# EAGLE board 555srvc-X6 (EAGLE 7.2.0)
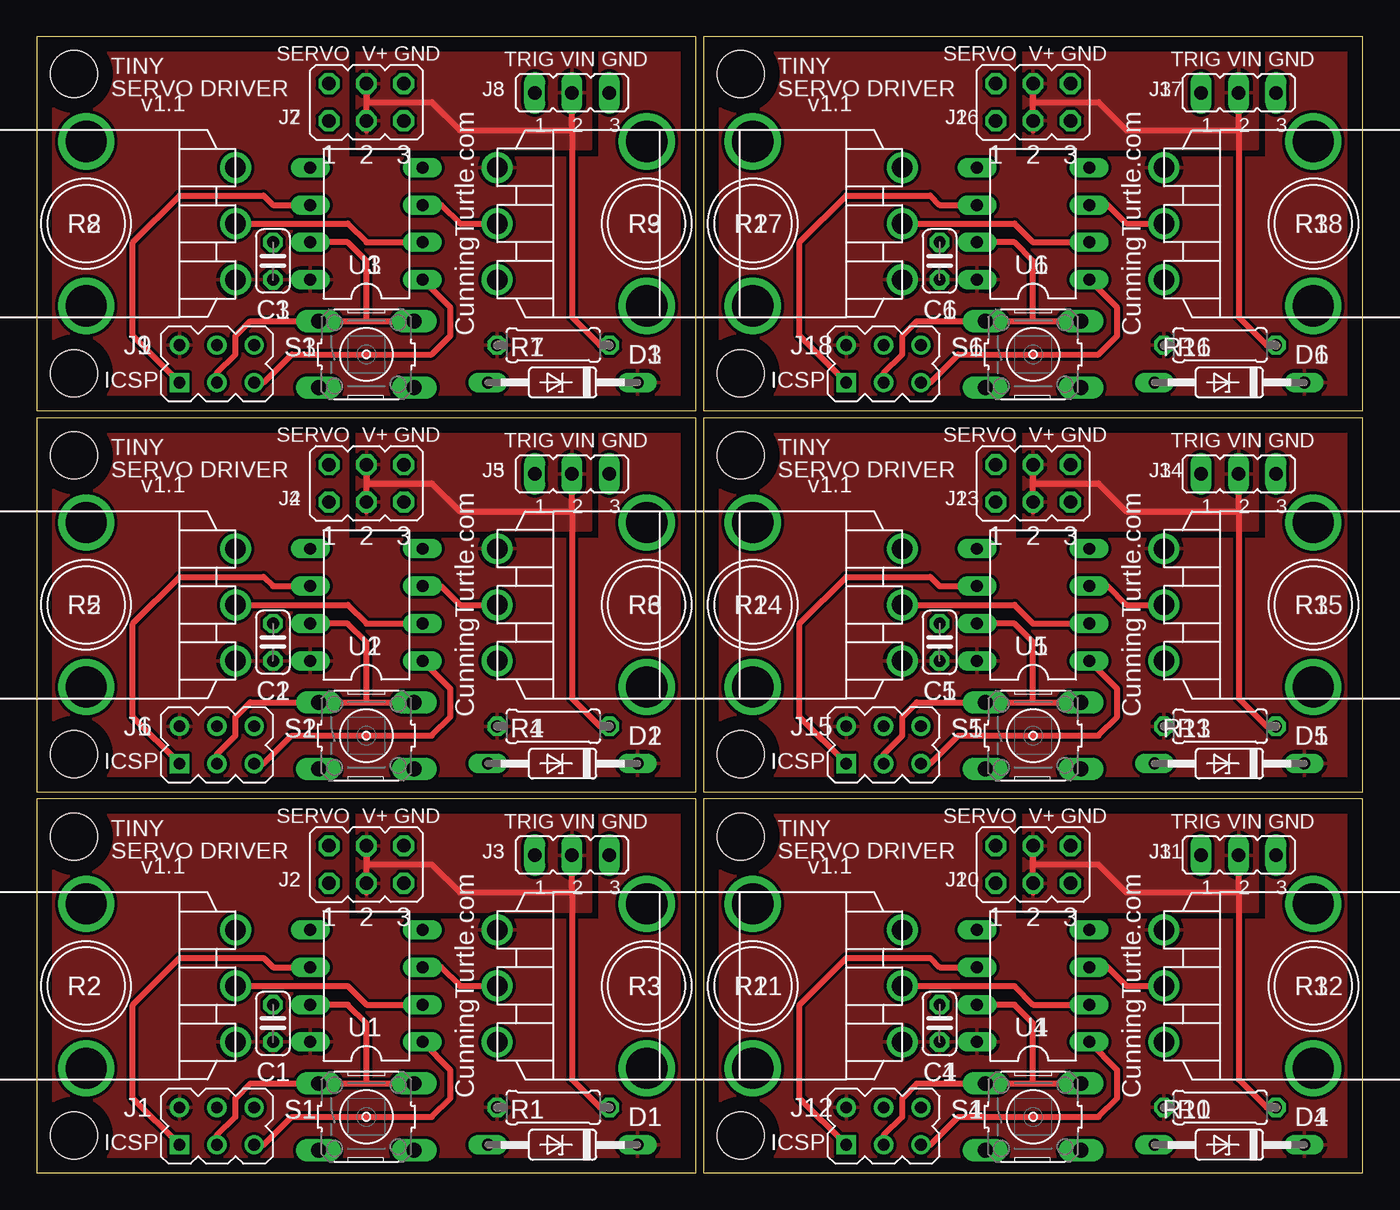
[diagram p0: board, top side]
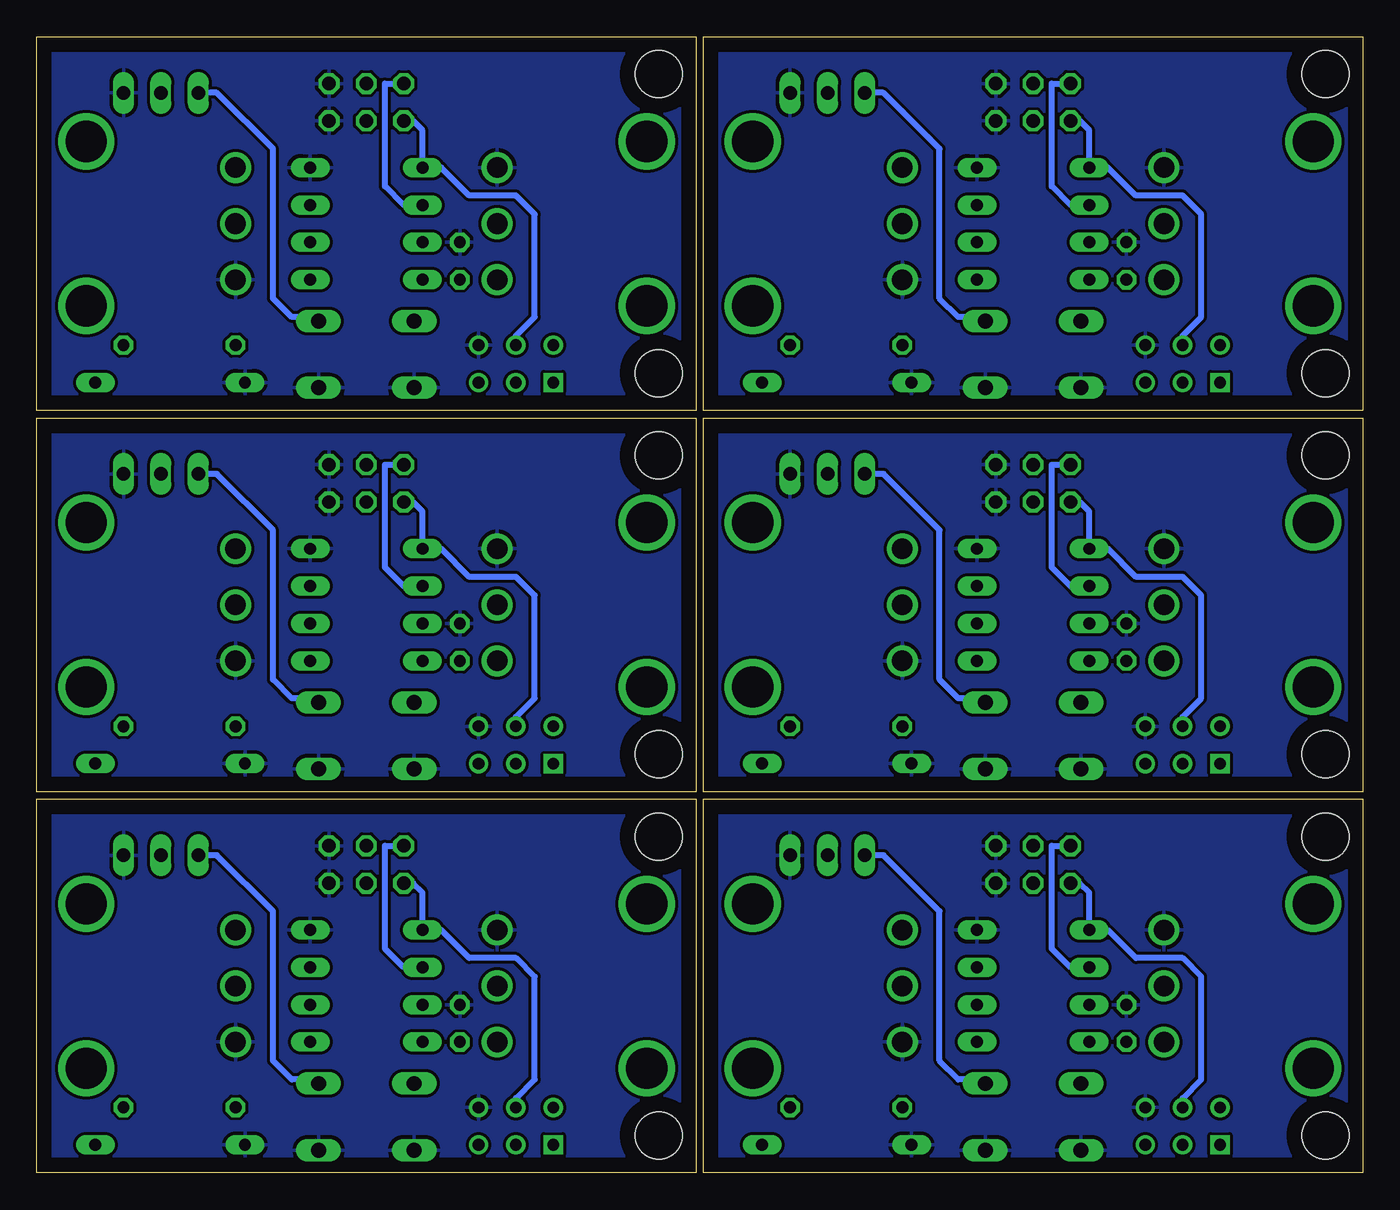
[diagram p1: board, bottom side, seen from below]

Size 90.11 x 77.21 mm. Coordinates in mm from the lower left corner, seen from the top.
Outline: 0,0 44.8,0 44.8,25.4 0,25.4 0,0
Outline: 0,25.91 44.8,25.91 44.8,51.3 0,51.3 0,25.91
Outline: 0,51.81 44.8,51.81 44.8,77.21 0,77.21 0,51.81
Outline: 45.31,0 90.11,0 90.11,25.4 45.31,25.4 45.31,0
Outline: 45.31,25.91 90.11,25.91 90.11,51.3 45.31,51.3 45.31,25.91
Outline: 45.31,51.81 90.11,51.81 90.11,77.21 45.31,77.21 45.31,51.81
Copper layers (1*16): Top 0.035mm / dielectric 1.5mm / Bottom 0.035mm
Design rules "default": minimum track width 10mil, minimum drill 0.6mm, track to track 8mil, track to pad 8mil, pad to pad 8mil, via to via 8mil, smd to smd 8mil, copper to edge 40mil, drill to drill 8mil, minimum pad ring 10mil, minimum via ring 8mil, stop-mask expansion 4mil, vias tented up to drill 0mil, thermal gap 10mil
Holes 3.2 mm at 2.54,2.54 2.54,22.86 2.54,28.45 2.54,48.77 2.54,54.35 2.54,74.67 47.85,2.54 47.85,22.86 47.85,28.45 47.85,48.77 47.85,54.35 47.85,74.67

## Footprints (pad centres in the part's own frame; a part is rotated, then mirrored left to right if it is on the bottom)
C025-024X044 = drill 0.813 octagon: 1 -1.27,0; 2 1.27,0
DO35Z10 = drill 0.813 long: A 5.08,0; C -5.08,0
AVR_ISP_6P = drill 0.8 square: 1 -2.54,-1.27 | drill 0.8: 2 -2.54,1.27; 3 0,-1.27; 4 0,1.27; 5 2.54,-1.27; 6 2.54,1.27
JP3Q = drill 0.914 octagon: 1 -2.54,-1.27; 2 -2.54,1.27; 3 0,-1.27; 4 0,1.27; 5 2.54,-1.27; 6 2.54,1.27
JP2 = drill 0.914 long: 1 -2.54,0; 2 0,0; 3 2.54,0
0207/7 = drill 0.813 octagon: 1 -3.81,0; 2 3.81,0
CT2265-ND = drill 1.4: 1 -10.16,3.81; 2 -10.16,0; 3 -10.16,-3.81 | drill 2.8: 4 0,5.588; 5 0,-5.588
TACTILE_6MM = drill 1.016 long: 1 -3.251,2.261; 2 3.251,2.261; 3 -3.251,-2.261; 4 3.251,-2.261
DIL08 = drill 0.813 long: 1 -3.81,-3.81; 2 -1.27,-3.81; 3 1.27,-3.81; 4 3.81,-3.81; 5 3.81,3.81; 6 1.27,3.81; 7 -1.27,3.81; 8 -3.81,3.81

## Placement (x,y rotation side)
C1  0.1uF  [C025-024X044]  16.05,10.16 90 top
C2  0.1uF  [C025-024X044]  16.05,36.06 90 top
C3  0.1uF  [C025-024X044]  16.05,61.97 90 top
C4  0.1uF  [C025-024X044]  61.36,10.16 90 top
C5  0.1uF  [C025-024X044]  61.36,36.06 90 top
C6  0.1uF  [C025-024X044]  61.36,61.97 90 top
D1  5.1V  [DO35Z10]  35.73,1.91 180 top
D2  5.1V  [DO35Z10]  35.73,27.81 180 top
D3  5.1V  [DO35Z10]  35.73,53.72 180 top
D4  5.1V  [DO35Z10]  81.04,1.91 180 top
D5  5.1V  [DO35Z10]  81.04,27.81 180 top
D6  5.1V  [DO35Z10]  81.04,53.72 180 top
J1  AVR_SPI_PRG  [AVR_ISP_6P]  12.24,3.17 0 top
J2  [JP3Q]  22.4,20.95 0 top
J3  [JP2]  36.37,21.59 0 top
J4  [JP3Q]  22.4,46.86 0 top
J5  [JP2]  36.37,47.49 0 top
J6  AVR_SPI_PRG  [AVR_ISP_6P]  12.24,29.08 0 top
J7  [JP3Q]  22.4,72.77 0 top
J8  [JP2]  36.37,73.4 0 top
J9  AVR_SPI_PRG  [AVR_ISP_6P]  12.24,54.98 0 top
J10  [JP3Q]  67.71,20.95 0 top
J11  [JP2]  81.68,21.59 0 top
J12  AVR_SPI_PRG  [AVR_ISP_6P]  57.55,3.17 0 top
J13  [JP3Q]  67.71,46.86 0 top
J14  [JP2]  81.68,47.49 0 top
J15  AVR_SPI_PRG  [AVR_ISP_6P]  57.55,29.08 0 top
J16  [JP3Q]  67.71,72.77 0 top
J17  [JP2]  81.68,73.4 0 top
J18  AVR_SPI_PRG  [AVR_ISP_6P]  57.55,54.98 0 top
R1  33  [0207/7]  35.1,4.45 180 top
R2  [CT2265-ND]  3.35,12.7 180 top
R3  [CT2265-ND]  41.45,12.7 0 top
R4  33  [0207/7]  35.1,30.35 180 top
R5  [CT2265-ND]  3.35,38.6 180 top
R6  [CT2265-ND]  41.45,38.6 0 top
R7  33  [0207/7]  35.1,56.26 180 top
R8  [CT2265-ND]  3.35,64.51 180 top
R9  [CT2265-ND]  41.45,64.51 0 top
R10  33  [0207/7]  80.41,4.45 180 top
R11  [CT2265-ND]  48.66,12.7 180 top
R12  [CT2265-ND]  86.76,12.7 0 top
R13  33  [0207/7]  80.41,30.35 180 top
R14  [CT2265-ND]  48.66,38.6 180 top
R15  [CT2265-ND]  86.76,38.6 0 top
R16  33  [0207/7]  80.41,56.26 180 top
R17  [CT2265-ND]  48.66,64.51 180 top
R18  [CT2265-ND]  86.76,64.51 0 top
S1  [TACTILE_6MM]  22.4,3.81 0 top
S2  [TACTILE_6MM]  22.4,29.71 0 top
S3  [TACTILE_6MM]  22.4,55.62 0 top
S4  [TACTILE_6MM]  67.71,3.81 0 top
S5  [TACTILE_6MM]  67.71,29.71 0 top
S6  [TACTILE_6MM]  67.71,55.62 0 top
U1  ATTINY85DIL08  [DIL08]  22.4,12.7 90 top
U2  ATTINY85DIL08  [DIL08]  22.4,38.6 90 top
U3  ATTINY85DIL08  [DIL08]  22.4,64.51 90 top
U4  ATTINY85DIL08  [DIL08]  67.71,12.7 90 top
U5  ATTINY85DIL08  [DIL08]  67.71,38.6 90 top
U6  ATTINY85DIL08  [DIL08]  67.71,64.51 90 top

## Library data of the parts
C1-C6 R1-R18 = resistor
D1-D6 = diode
J1 J6 J9 J12 J15 J18 S1-S6 U1-U6 = CunningTurtle
J2-J5 J7 J8 J10 J11 J13 J14 J16 J17 = jumper

## Nets
GND: C1.2 D1.A J1.6 J2.5 J2.6 J3.3 R2.3 R3.3 S1.3 S1.4 U1.4
GND1: C2.2 D2.A J4.5 J4.6 J5.3 J6.6 R5.3 R6.3 S2.3 S2.4 U2.4
GND2: C3.2 D3.A J7.5 J7.6 J8.3 J9.6 R8.3 R9.3 S3.3 S3.4 U3.4
GND3: C4.2 D4.A J10.5 J10.6 J11.3 J12.6 R11.3 R12.3 S4.3 S4.4 U4.4
GND4: C5.2 D5.A J13.5 J13.6 J14.3 J15.6 R14.3 R15.3 S5.3 S5.4 U5.4
GND5: C6.2 D6.A J16.5 J16.6 J17.3 J18.6 R17.3 R18.3 S6.3 S6.4 U6.4
MISO/PWM1: J4.2 J6.1 U2.6
MISO/PWM2: J1.1 J2.2 U1.6
MISO/PWM3: J7.2 J9.1 U3.6
MISO/PWM4: J10.2 J12.1 U4.6
MISO/PWM5: J13.2 J15.1 U5.6
MISO/PWM6: J16.2 J18.1 U6.6
MOSI/PWM1: J1.4 J2.1 U1.5
MOSI/PWM2: J4.1 J6.4 U2.5
MOSI/PWM3: J7.1 J9.4 U3.5
MOSI/PWM4: J10.1 J12.4 U4.5
MOSI/PWM5: J13.1 J15.4 U5.5
MOSI/PWM6: J16.1 J18.4 U6.5
POT1: R2.2 U1.2
POT2: R3.2 U1.3
POT3: R5.2 U2.2
POT4: R6.2 U2.3
POT5: R8.2 U3.2
POT6: R9.2 U3.3
POT7: R11.2 U4.2
POT8: R12.2 U4.3
POT9: R14.2 U5.2
POT10: R15.2 U5.3
POT11: R17.2 U6.2
POT12: R18.2 U6.3
RESET_N: J1.5 U1.1
RESET_N1: J6.5 U2.1
RESET_N2: J9.5 U3.1
RESET_N3: J12.5 U4.1
RESET_N4: J15.5 U5.1
RESET_N5: J18.5 U6.1
SCK/SWITCH: J1.3 J3.1 S1.1 S1.2 U1.7
SCK/SWITCH1: J5.1 J6.3 S2.1 S2.2 U2.7
SCK/SWITCH2: J8.1 J9.3 S3.1 S3.2 U3.7
SCK/SWITCH3: J11.1 J12.3 S4.1 S4.2 U4.7
SCK/SWITCH4: J14.1 J15.3 S5.1 S5.2 U5.7
SCK/SWITCH5: J17.1 J18.3 S6.1 S6.2 U6.7
V+: J2.3 J2.4 J3.2 R1.1
V+1: J4.3 J4.4 J5.2 R4.1
V+2: J7.3 J7.4 J8.2 R7.1
V+3: J10.3 J10.4 J11.2 R10.1
V+4: J13.3 J13.4 J14.2 R13.1
V+5: J16.3 J16.4 J17.2 R16.1
VCC: C1.1 D1.C J1.2 R1.2 R2.1 R3.1 U1.8
VCC1: C2.1 D2.C J6.2 R4.2 R5.1 R6.1 U2.8
VCC2: C3.1 D3.C J9.2 R7.2 R8.1 R9.1 U3.8
VCC3: C4.1 D4.C J12.2 R10.2 R11.1 R12.1 U4.8
VCC4: C5.1 D5.C J15.2 R13.2 R14.1 R15.1 U5.8
VCC5: C6.1 D6.C J18.2 R16.2 R17.1 R18.1 U6.8

## Tracks (layer width: path | path; a pad name or v marks a point on that pad's centre or on a via)
GND
  pour Bottom: 0,25.4 0,0 44.8,0 44.8,25.4
GND1
  pour Bottom: 0,51.3 0,25.91 44.8,25.91 44.8,51.3
GND2
  pour Bottom: 0,77.21 0,51.81 44.8,51.81 44.8,77.21
GND3
  pour Bottom: 45.31,25.4 45.31,0 90.11,0 90.11,25.4
GND4
  pour Bottom: 45.31,51.3 45.31,25.91 90.11,25.91 90.11,51.3
GND5
  pour Bottom: 45.31,77.21 45.31,51.81 90.11,51.81 90.11,77.21
MISO/PWM1
  Top 0.406: J6.1 6.53,30.98 6.53,37.34 9.7,40.51 15.42,40.51 16.05,39.88 U2.6
  Bottom 0.406: J4.2 21.13,48.13 21.13,41.15 19.86,39.88 U2.6
MISO/PWM2
  Top 0.406: J1.1 6.53,5.08 6.53,11.43 9.7,14.61 15.42,14.61 16.05,13.97 U1.6
  Bottom 0.406: J2.2 21.13,22.23 21.13,15.24 19.86,13.97 U1.6
MISO/PWM3
  Top 0.406: J9.1 6.53,56.89 6.53,63.24 9.7,66.42 15.42,66.42 16.05,65.78 U3.6
  Bottom 0.406: J7.2 21.13,74.03 21.13,67.05 19.86,65.78 U3.6
MISO/PWM4
  Top 0.406: J12.1 51.83,5.08 51.83,11.43 55.01,14.61 60.72,14.61 61.36,13.97 U4.6
  Bottom 0.406: J10.2 66.44,22.23 66.44,15.24 65.17,13.97 U4.6
MISO/PWM5
  Top 0.406: J15.1 51.83,30.98 51.83,37.34 55.01,40.51 60.72,40.51 61.36,39.88 U5.6
  Bottom 0.406: J13.2 66.44,48.13 66.44,41.15 65.17,39.88 U5.6
MISO/PWM6
  Top 0.406: J18.1 51.83,56.89 51.83,63.24 55.01,66.42 60.72,66.42 61.36,65.78 U6.6
  Bottom 0.406: J16.2 66.44,74.03 66.44,67.05 65.17,65.78 U6.6
MOSI/PWM1
  Bottom 0.406: J1.4 12.24,5.08 10.97,6.35 10.97,13.34 12.24,14.61 15.42,14.61 17.32,16.51 U1.5 18.59,19.05 19.23,19.68 J2.1
MOSI/PWM2
  Bottom 0.406: J6.4 12.24,30.98 10.97,32.26 10.97,39.24 12.24,40.51 15.42,40.51 17.32,42.41 U2.5 18.59,44.95 19.23,45.59 J4.1
MOSI/PWM3
  Bottom 0.406: J9.4 12.24,56.89 10.97,58.16 10.97,65.14 12.24,66.42 15.42,66.42 17.32,68.32 U3.5 18.59,70.86 19.23,71.5 J7.1
MOSI/PWM4
  Bottom 0.406: J12.4 57.55,5.08 56.28,6.35 56.28,13.34 57.55,14.61 60.72,14.61 62.63,16.51 U4.5 63.9,19.05 64.53,19.68 J10.1
MOSI/PWM5
  Bottom 0.406: J15.4 57.55,30.98 56.28,32.26 56.28,39.24 57.55,40.51 60.72,40.51 62.63,42.41 U5.5 63.9,44.95 64.53,45.59 J13.1
MOSI/PWM6
  Bottom 0.406: J18.4 57.55,56.89 56.28,58.16 56.28,65.14 57.55,66.42 60.72,66.42 62.63,68.32 U6.5 63.9,70.86 64.53,71.5 J16.1
POT1
  Top 0.406: R2.2 21.13,12.7 22.4,11.43 U1.2
POT2
  Top 0.406: U1.3 27.48,13.97 28.75,12.7 R3.2
POT3
  Top 0.406: R5.2 21.13,38.6 22.4,37.34 U2.2
POT4
  Top 0.406: U2.3 27.48,39.88 28.75,38.6 R6.2
POT5
  Top 0.406: R8.2 21.13,64.51 22.4,63.24 U3.2
POT6
  Top 0.406: U3.3 27.48,65.78 28.75,64.51 R9.2
POT7
  Top 0.406: R11.2 66.44,12.7 67.71,11.43 U4.2
POT8
  Top 0.406: U4.3 72.79,13.97 74.06,12.7 R12.2
POT9
  Top 0.406: R14.2 66.44,38.6 67.71,37.34 U5.2
POT10
  Top 0.406: U5.3 72.79,39.88 74.06,38.6 R15.2
POT11
  Top 0.406: R17.2 66.44,64.51 67.71,63.24 U6.2
POT12
  Top 0.406: U6.3 72.79,65.78 74.06,64.51 R18.2
RESET_N
  Top 0.406: J1.5 15.42,1.91 17.32,3.81 26.85,3.81 28.12,5.08 28.12,6.99 U1.1
RESET_N1
  Top 0.406: J6.5 15.42,27.81 17.32,29.71 26.85,29.71 28.12,30.98 28.12,32.89 U2.1
RESET_N2
  Top 0.406: J9.5 15.42,53.72 17.32,55.62 26.85,55.62 28.12,56.89 28.12,58.8 U3.1
RESET_N3
  Top 0.406: J12.5 60.72,1.91 62.63,3.81 72.15,3.81 73.42,5.08 73.42,6.99 U4.1
RESET_N4
  Top 0.406: J15.5 60.72,27.81 62.63,29.71 72.15,29.71 73.42,30.98 73.42,32.89 U5.1
RESET_N5
  Top 0.406: J18.5 60.72,53.72 62.63,55.62 72.15,55.62 73.42,56.89 73.42,58.8 U6.1
SCK/SWITCH
  Top 0.406: 22.4,6.07 S1.1 14.5,6.07 13.51,5.08 13.51,3.81 12.24,2.54 J1.3 | 22.4,6.07 S1.2 | U1.7 21.13,11.43 22.4,10.16 22.4,6.07
  Bottom 0.406: J3.1 32.56,21.59 28.75,17.78 28.75,7.62 27.48,6.35 25.93,6.35 S1.2
SCK/SWITCH1
  Top 0.406: 22.4,31.98 S2.1 14.5,31.98 13.51,30.98 13.51,29.71 12.24,28.45 J6.3 | 22.4,31.98 S2.2 | U2.7 21.13,37.34 22.4,36.06 22.4,31.98
  Bottom 0.406: J5.1 32.56,47.49 28.75,43.69 28.75,33.52 27.48,32.26 25.93,32.26 S2.2
SCK/SWITCH2
  Top 0.406: 22.4,57.88 S3.1 14.5,57.88 13.51,56.89 13.51,55.62 12.24,54.35 J9.3 | 22.4,57.88 S3.2 | U3.7 21.13,63.24 22.4,61.97 22.4,57.88
  Bottom 0.406: J8.1 32.56,73.4 28.75,69.59 28.75,59.43 27.48,58.16 25.93,58.16 S3.2
SCK/SWITCH3
  Top 0.406: 67.71,6.07 S4.1 59.81,6.07 58.82,5.08 58.82,3.81 57.55,2.54 J12.3 | 67.71,6.07 S4.2 | U4.7 66.44,11.43 67.71,10.16 67.71,6.07
  Bottom 0.406: J11.1 77.87,21.59 74.06,17.78 74.06,7.62 72.79,6.35 71.24,6.35 S4.2
SCK/SWITCH4
  Top 0.406: 67.71,31.98 S5.1 59.81,31.98 58.82,30.98 58.82,29.71 57.55,28.45 J15.3 | 67.71,31.98 S5.2 | U5.7 66.44,37.34 67.71,36.06 67.71,31.98
  Bottom 0.406: J14.1 77.87,47.49 74.06,43.69 74.06,33.52 72.79,32.26 71.24,32.26 S5.2
SCK/SWITCH5
  Top 0.406: 67.71,57.88 S6.1 59.81,57.88 58.82,56.89 58.82,55.62 57.55,54.35 J18.3 | 67.71,57.88 S6.2 | U6.7 66.44,63.24 67.71,61.97 67.71,57.88
  Bottom 0.406: J17.1 77.87,73.4 74.06,69.59 74.06,59.43 72.79,58.16 71.24,58.16 S6.2
V+
  Top 0.406: 36.37,19.05 36.37,6.35 38.28,4.45 R1.1 | 36.37,19.05 J3.2 | J2.3 J2.4 22.4,20.95 | 22.4,19.05 22.4,20.95 | 22.4,20.95 26.85,20.95 28.75,19.05 36.37,19.05
  pour Top: 21.77,25.4 21.77,17.78 37.64,17.78 37.64,25.4
V+1
  Top 0.406: 36.37,44.95 36.37,32.26 38.28,30.35 R4.1 | 36.37,44.95 J5.2 | J4.3 J4.4 22.4,46.86 | 22.4,44.95 22.4,46.86 | 22.4,46.86 26.85,46.86 28.75,44.95 36.37,44.95
  pour Top: 21.77,51.3 21.77,43.69 37.64,43.69 37.64,51.3
V+2
  Top 0.406: 36.37,70.86 36.37,58.16 38.28,56.26 R7.1 | 36.37,70.86 J8.2 | J7.3 J7.4 22.4,72.77 | 22.4,70.86 22.4,72.77 | 22.4,72.77 26.85,72.77 28.75,70.86 36.37,70.86
  pour Top: 21.77,77.21 21.77,69.59 37.64,69.59 37.64,77.21
V+3
  Top 0.406: 81.68,19.05 81.68,6.35 83.58,4.45 R10.1 | 81.68,19.05 J11.2 | J10.3 J10.4 67.71,20.95 | 67.71,19.05 67.71,20.95 | 67.71,20.95 72.15,20.95 74.06,19.05 81.68,19.05
  pour Top: 67.07,25.4 67.07,17.78 82.95,17.78 82.95,25.4
V+4
  Top 0.406: 81.68,44.95 81.68,32.26 83.58,30.35 R13.1 | 81.68,44.95 J14.2 | J13.3 J13.4 67.71,46.86 | 67.71,44.95 67.71,46.86 | 67.71,46.86 72.15,46.86 74.06,44.95 81.68,44.95
  pour Top: 67.07,51.3 67.07,43.69 82.95,43.69 82.95,51.3
V+5
  Top 0.406: 81.68,70.86 81.68,58.16 83.58,56.26 R16.1 | 81.68,70.86 J17.2 | J16.3 J16.4 67.71,72.77 | 67.71,70.86 67.71,72.77 | 67.71,72.77 72.15,72.77 74.06,70.86 81.68,70.86
  pour Top: 67.07,77.21 67.07,69.59 82.95,69.59 82.95,77.21
VCC
  pour Top: 0,25.4 0,0 44.8,0 44.8,25.4 38.27,25.4 38.27,17.14 21.13,17.14 21.13,25.4
VCC1
  pour Top: 0,51.3 0,25.91 44.8,25.91 44.8,51.3 38.27,51.3 38.27,43.05 21.13,43.05 21.13,51.3
VCC2
  pour Top: 0,77.21 0,51.81 44.8,51.81 44.8,77.21 38.27,77.21 38.27,68.95 21.13,68.95 21.13,77.21
VCC3
  pour Top: 45.31,25.4 45.31,0 90.11,0 90.11,25.4 83.58,25.4 83.58,17.14 66.44,17.14 66.44,25.4
VCC4
  pour Top: 45.31,51.3 45.31,25.91 90.11,25.91 90.11,51.3 83.58,51.3 83.58,43.05 66.44,43.05 66.44,51.3
VCC5
  pour Top: 45.31,77.21 45.31,51.81 90.11,51.81 90.11,77.21 83.58,77.21 83.58,68.95 66.44,68.95 66.44,77.21

## Text on the board
tPlace: SERVO V+ GND | SERVO V+ GND | TINY | TRIG VIN GND | TINY | TRIG VIN GND | SERVO DRIVER | SERVO DRIVER | v1.1 | v1.1 | CunningTurtle.com | CunningTurtle.com | ICSP | ICSP | SERVO V+ GND | SERVO V+ GND | TINY | TRIG VIN GND | TINY | TRIG VIN GND | SERVO DRIVER | SERVO DRIVER | v1.1 | v1.1 | CunningTurtle.com | CunningTurtle.com | ICSP | ICSP | SERVO V+ GND | SERVO V+ GND | TINY | TRIG VIN GND | TINY | TRIG VIN GND | SERVO DRIVER | SERVO DRIVER | v1.1 | v1.1 | CunningTurtle.com | CunningTurtle.com | ICSP | ICSP
_tnames: J3 | J3 | J2 | J2 | R2 | R3 | R2 | R3 | U1 | U1 | C1 | C1 | R1 | R1 | J1 | D1 | J1 | D1 | S1 | S1 | J3 | J3 | J2 | J2 | R2 | R3 | R2 | R3 | U1 | U1 | C1 | C1 | R1 | R1 | J1 | S1 | D1 | J1 | S1 | D1 | J3 | J3 | J2 | J2 | R2 | R3 | R2 | R3 | U1 | U1 | C1 | C1 | R1 | R1 | J1 | S1 | D1 | J1 | S1 | D1